# Altium PCB gumstix expansion board.PcbDoc
Units mil, origin at the board's own origin, x right, y up, seen from the top; angles counter-clockwise.
Board outline 3900 x 3900 mil, 2 copper layers (Top Layer, Bottom Layer); 19 components, 21 nets, 198 pads, 47 vias.
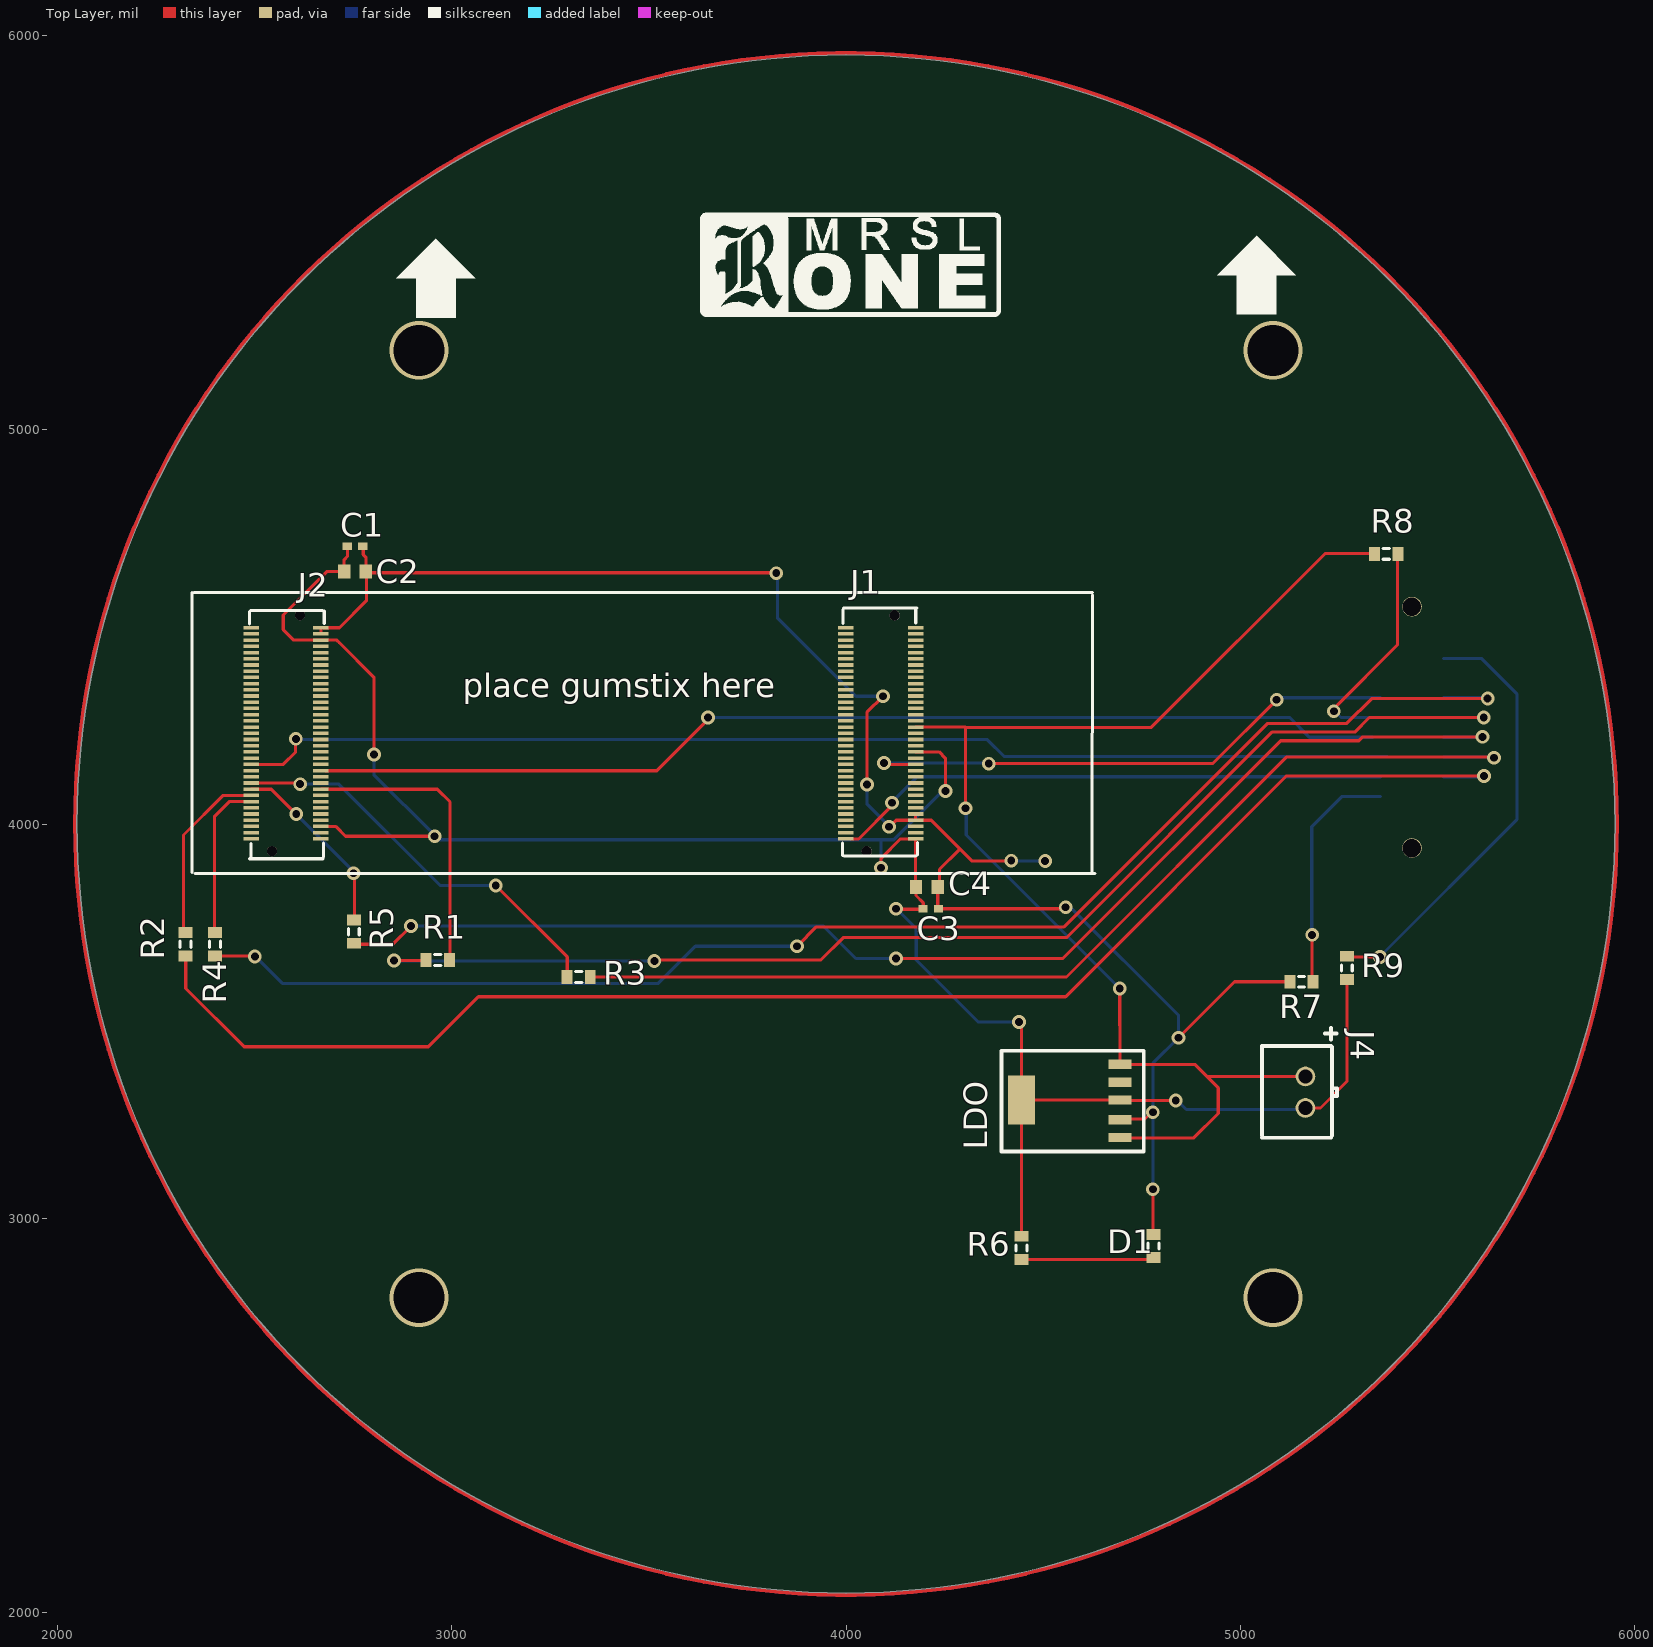
[diagram p0: Top Layer view]
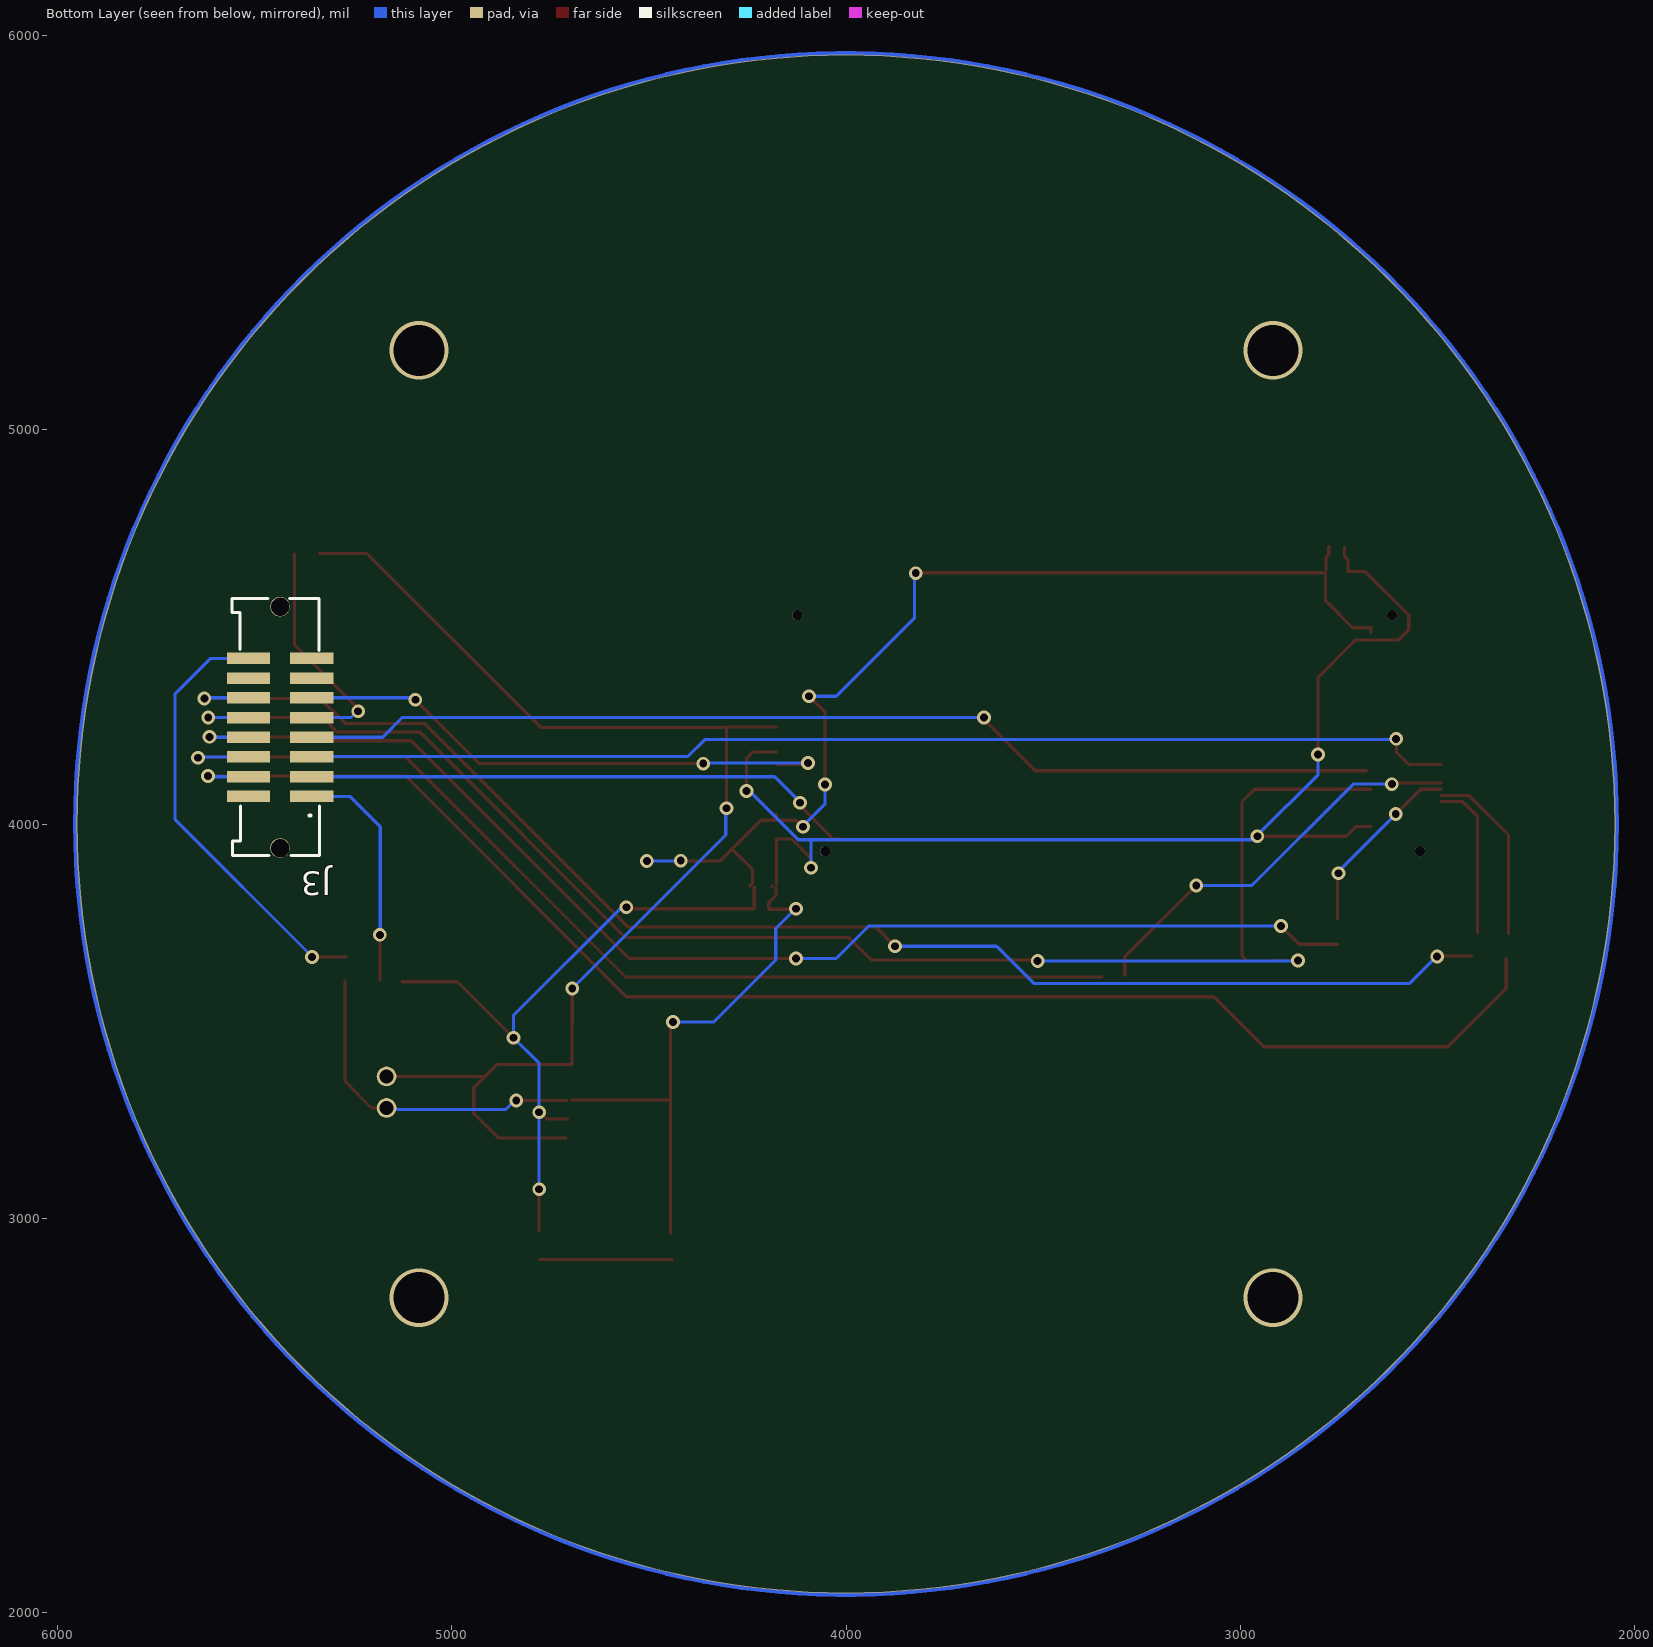
[diagram p1: Bottom Layer view, seen from below]

## Layer stack, top to bottom
Top Layer: signal copper 1.4
Dielectric: dielectric 12.6, FR-4, Dk 4.8
Bottom Layer: signal copper 1.4

## Board outline
4000,2050 cw(c4000,4000) 2050,4000 cw(c4000,4000) 4000,5950 cw(c4000,4000) 5950,4000 cw(c4000,4000)

## Design rules (kind name [scope] priority, off if disabled: settings)
Clearance [All] p1: gap=8
PolygonConnect [All] p1: connectstyle=Relief reliefconductorwidth=10 reliefentries=4 polygonreliefangle="90 Angle"
RoutingVias [All] p1: holewidth=20 width=35 viastyle="Through Hole" minholewidth=20 minwidth=35 maxholewidth=20 maxwidth=35
SMDNeckDown [All] p1: percent=400.000
SilkscreenOverComponentPads [All] p1: minsilkscreentomaskgap=10
SolderMaskExpansion [All] p1: expansion=4
Width [All] p1: maxlimit=8 minlimit=8 preferedwidth=8
27 further rules are at their usual default settings.

## Components (designator, comment, footprint, x,y, rotation, side; value= is the part's Value field where it differs from the comment)
C1 "" CAPC1005L 2755,4704 r0 top
C2 "Cap Semi" CAPC1608L 2755,4640 r0 top
C3 "" CAPC1005L 4215,3785 r0 top
C4 "Cap Semi" CAPC1608L 4205,3840 r0 top
D1 "LED" SurfaceMount(603) 4780,2930 r270 top
J1 "70 pin connector" "AVX CONN_70" 4087.87,4230 r0 top locked
J2 "70 pin connector" "AVX CONN_70" 2580,4230 r180 top locked
J3 "expansion" "HEADERSM 8X2" 5435,4245 r0 bottom locked
J4 "Bat" BatteryConnJST 5165,3320 r270 top
LDO "TPS73733" SOT-223-5pin 4695,3300 r90 top
R1 "Res3" RESC1608L 2965,3655 r0 top
R2 "Res3" RESC1608L 2325,3695 r90 top
R3 "Res3" RESC1608L 3322,3612 r180 top
R4 "Res3" RESC1608L 2400,3695 r270 top
R5 "Res3" RESC1608L 2752,3727 r270 top
R6 "Res3" RESC1608L 4445,2925 r270 top
R7 "Res3" RESC1608L 5155,3600 r0 top
R8 "Res3" RESC1608L 5370,4685 r0 top
R9 "Res3" RESC1608L 5270,3635 r270 top

## Footprints (in the part's own frame and the unit in brackets; to place one, negate y for a bottom-side part, rotate by r counter-clockwise, add the part's x,y. Pads: shape width x height; smd on the part's side, far side on the other; paste and mask are expansions set on the pad)
"AVX CONN_70" [mm]
  rect 1x0.23 smd: 1(-2.25,-6.8) 2(-2.25,-6.4) 3(-2.25,-6) 4(-2.25,-5.6) 5(-2.25,-5.2) 6(-2.25,-4.8) 7(-2.25,-4.4) 8(-2.25,-4) 9(-2.25,-3.6) 10(-2.25,-3.2) 11(-2.25,-2.8) 12(-2.25,-2.4) 13(-2.25,-2) 14(-2.25,-1.6) 15(-2.25,-1.2) 16(-2.25,-0.8) 17(-2.25,-0.4) 18(-2.25,0) 19(-2.25,0.4) 20(-2.25,0.8) 21(-2.25,1.2) 22(-2.25,1.6) 23(-2.25,2) 24(-2.25,2.4) 25(-2.25,2.8) 26(-2.25,3.2) 27(-2.25,3.6) 28(-2.25,4) 29(-2.25,4.4) 30(-2.25,4.8) 31(-2.25,5.2) 32(-2.25,5.6) 33(-2.25,6) 34(-2.25,6.4) 35(-2.25,6.8) 36(2.25,6.8) 37(2.25,6.4) 38(2.25,6) 39(2.25,5.6) 40(2.25,5.2) 41(2.25,4.8) 42(2.25,4.4) 43(2.25,4) 44(2.25,3.6) 45(2.25,3.2) 46(2.25,2.8) 47(2.25,2.4) 48(2.25,2) 49(2.25,1.6) 50(2.25,1.2) 51(2.25,0.8) 52(2.25,0.4) 53(2.25,0) 54(2.25,-0.4) 55(2.25,-0.8) 56(2.25,-1.2) 57(2.25,-1.6) 58(2.25,-2) 59(2.25,-2.4) 60(2.25,-2.8) 61(2.25,-3.2) 62(2.25,-3.6) 63(2.25,-4) 64(2.25,-4.4) 65(2.25,-4.8) 66(2.25,-5.2) 67(2.25,-5.6) 68(2.25,-6) 69(2.25,-6.4) 70(2.25,-6.8)
  round 0.65 hole 0.65: C1(-0.9,-7.6) C2(0.9,7.6)
  silkscreen extent -2.46,-7.9 2.36,8.08
BatteryConnJST [mil] "Connector for Battery"
  round 50 hole 35: 1(-40,0) 2(40,0)
  silkscreen extent -163,-110 116,80
CAPC1005L [mm] "Chip Capacitor, Body 1.0x0.5mm, IPC High Density"
  rect 0.6x0.5 smd: 1(-0.5,0) 2(0.5,0)
  body extent -0.55,-0.3 0.55,0.3, height 1.3
CAPC1608L [mm] "Chip Capacitor, Body 1.6x0.8mm, IPC High Density"
  rect 0.8x0.9 smd: 1(-0.7,0) 2(0.7,0)
  body extent -0.87,-0.48 0.87,0.48, height 1.3
"HEADERSM 8X2" [mm]
  rect 2.795x0.74 smd: 1(-2.033,4.445) 2(2.033,4.445) 3(-2.033,3.175) 4(2.033,3.175) 5(-2.033,1.905) 6(2.033,1.905) 7(-2.033,0.635) 8(2.033,0.635) 9(-2.033,-0.635) 10(2.033,-0.635) 11(-2.033,-1.905) 12(2.033,-1.905) 13(-2.033,-3.175) 14(2.033,-3.175) 15(-2.033,-4.445) 16(2.033,-4.445)
  round 1.27 hole 1.19: c1(0,7.773) c2(0,-7.773)
  silkscreen extent -2.54,-8.29 3.1,8.25
RESC1608L [mm] "Chip Resistor, Body 1.6x0.8mm, IPC High Density"
  rect 0.7x0.9 smd: 1(-0.75,0) 2(0.75,0)
  silkscreen extent -0.2,-0.35 0.2,0.35, body extent -0.85,-0.48 0.85,0.48, height 0.9
SOT-223-5pin [mm] "sot223 tps73733"
  rect 0.6x1.5 smd: 1(-2.413,0) 2(-1.27,0) 3(0,0) 4(1.143,0) 5(2.3,0)
  rect 3.15x1.75 smd: 6(0,6.35)
  silkscreen extent -3.3,-1.52 3.17,7.65
SurfaceMount(603) [mm]
  rect 0.7x0.9 smd: 1(-0.75,0) 2(0.75,0)
  silkscreen extent -0.2,-0.35 0.2,0.35, body extent -0.85,-0.48 0.85,0.48, height 0.9

## Part data
C1 C3: library part Cap, "Capacitor"
C2 C4: "Capacitor (Semiconductor SIM Model)"
J1 J2: library part "70 pin AVX connector"
J3: library part "HEADER 8X2"
J4: library part BatteryConnJST
LDO: library part LDO33-TI-TPS73733
R1 R2 R3 R4 R5 R6 R7 R8 R9: "Resistor"

## Via types
v1: diameter 35, hole 20, Top Layer to Bottom Layer, 43 vias
v2: diameter 149, hole 129, Top Layer to Bottom Layer, 4 vias

## Nets (pads, with @x,y where several pads share a name; then routed paths per layer and width w, separated by ;. In a path a pad name is that pad's centre, name@x,y a point inside that pad or via, vN(x,y) a via of type N, cw(c..) or ccw(c..) an arc to the next point about the centre after c; other vN are vias at no path point)
3.3V: C1.2 C2.2 C3.2 C4.2 D1.1 J1.66 J1.67 J2.1 J2.2 LDO.2 R7.1 | length 4476.6
  Top Layer w8: J2.2@2668.58,4485.42 J2.1 2715.72,4497.72 2784,4566 C2.2@2784,4638 ; C1.2@2776,4703 2776,4683 2782.56,4676.44 C2.2@2782.56,4644 ; C2.2@2791,4637 v1@3817,4637 ; v1(4053,4100) 4053,4283 v1(4094,4324) ; v1@4113,3995 4127.53,4009.53 J1.67 4216.47,4009.53 4320,3906 ; J1.67@4176.46,4010.46 J1.66 ; C3.2@4232.56,3786.44 C4.2 ; C3.2 v1@4553,3785 ; C4.2@4244,3842.56 4237,3849.56 4237,3885 4287,3935 ; 4322,3906 4320,3906 ; v1@4415,3908 4413,3906 4320,3906 ; v1@4565,3791 v1@4565,3793 ; LDO.2@4707,3252 4758,3252 4775,3269 v1(4778,3269) ; D1.1@4778,2968 v1(4778,3074) ; v1(4843,3458) 4985,3600 R7.1
  Bottom Layer w8: v1@3826,4635 3826,4523 4025,4324 v1(4094,4324) ; v1(4053,4100) 4053,4051 v1@4108,3996 ; v1@4415,3908 4417,3906 v1(4505,3906) ; v1@4565,3793 4843,3515 v1(4843,3458) 4778,3393 v1(4778,3269) v1@4778,3079
  other v1: 4557,3789 4419,3907 4109,3993 3823,4636
ADC_EXPAND: J1.58 J3.11 | length 1403.7
  Top Layer w8: v1@4096.74,4151.26 J1.58 ; v1@4358,4153.26 4930.26,4153.26 v1(5092,4315)
  Bottom Layer w8: v1(4096,4155) v1@4356,4155 ; v1@5092,4320 J3.11
  other v1: 4362,4153
FTDI_RX: J2.48 J3.5 | length 2940.1
  Top Layer w8: J2.48 2573.26,4151.26 2604,4182 v1@2604,4215
  Bottom Layer w8: v1@2608,4214 4358,4214 4401,4171 J3.5@5372,4171
  other v1: 2605,4216
FTDI_TX: J2.24 J3.7 | length 2733.3
  Top Layer w8: J2.24@2681,4135 3519.8,4135 ; 3520,4135 v1@3653.5,4268.5
  Bottom Layer w8: v1(3650,4270) 5125,4270 5175,4220 J3.7@5335,4220
GND: C1.1 C2.1 C3.1 C4.1 J1.56 J1.70 J2.3 J2.33 J4.2 LDO.3 LDO.6 R6.1 R9.2 | length 5420.6
  Top Layer w8: 2643.15,4466.22 2636.78,4466.22 ; J2.33 2703.78,3993.78 ; 2707,3993 2731,3969 v1@2954,3969 ; 2715,4460 2716,4459 ; C2.1 2683,4640 2573,4530 2573,4493 2599.78,4466.22 2636.78,4466.22 ; C2.1@2727.44,4644 2727.44,4670.44 2736,4679 C1.1@2736,4702 ; v1@2803,4181 2803,4372 2716,4459 ; v1(2957,3969) v1@2957,3972 ; v1(4089,3889) 4089,3913 4138.28,3962.28 J1.70 C4.1@4176.46,3847.54 ; v1@4121,3792 4125,3792 4133,3784 C3.1@4195,3784 ; J1.56 4236.24,4182.76 4252,4167 v1@4252,4088 ; C4.1 4177.44,3818.56 4196,3800 C3.1@4196,3787 ; C4.1@4187,3842 C4.1@4188,3841 ; v1(4439,3498) 4445,3492 LDO.6 R6.1@4445,2963 ; LDO.6@4447,3300 LDO.3 ; LDO.3@4708,3299 4834,3299 v1@4837,3302 ; J4.2 5203,3280 5270,3347 R9.2@5270,3601 ; 2636.78,4466.22 J2.3 2708.78,4466.22 2716,4459
  Bottom Layer w8: v1(2803,4176) 2803,4125 v1@2957,3971 ; v1(2957,3969) 2966,3960 4089,3960 ; v1(4089,3889) 4089,3960 ; v1@4121,3792 4178,3735 4178,3655 4335,3498 v1(4439,3498) ; v1@4243,4082 4121,3960 4089,3960 ; v1@4837,3302 4863,3276 J4.2@5158,3276
  other v1: 4836,3299 4127,3785 4252,4084
NetD1_2: D1.2 R6.2 | length 336.5
  Top Layer w8: R6.2@4440,2895.47 D1.2@4776.47,2895.47
NetJ2_27: J2.27 R1.2 | length 742.4
  Top Layer w8: J2.27 2963,4088.27 ; 2964,4088 2996,4056 2996,3666 R1.2@2987,3657
NetJ2_42: J2.42 R4.1 | length 403.6
  Top Layer w8: R4.1@2399,3724 2399,4020 2435.77,4056.77 J2.42
NetJ2_43: J2.43 R2.2 | length 463.1
  Top Layer w8: R2.2@2320,3722 2320,3972 2420.52,4072.52 J2.43
NetJ2_44: J2.44 R5.1 | length 464.3
  Top Layer w8: J2.44 2542.73,4088.27 v1(2606,4025) ; R5.1@2754,3759 v1@2754,3876
  Bottom Layer w8: v1(2606,4025) v1@2752,3879
  other v1: 2751,3875
NetJ2_45: J2.45 R3.2 | length 1021.7
  Top Layer w8: J2.45 v1@2615.98,4104.02 ; v1(3112,3844) 3293,3663 R3.2@3293,3617
  Bottom Layer w8: v1@2624,4092 2633,4101 2714,4101 2971,3844 v1@3109,3844
  other v1: 2616,4101
NetJ3_1: J3.1 R7.2 | length 592.9
  Top Layer w8: R7.2@5182,3605 v1(5182,3719)
  Bottom Layer w8: v1@5181,3720 5181,3993 5258,4070 J3.1
NetJ3_9: J3.9 R8.2 | length 598.2
  Top Layer w8: v1@5239,4295 5398,4454 5398,4683.47 R8.2
  Bottom Layer w8: v1@5234,4291 v1@5236,4289 ; v1@5236,4284 v1@5236,4289 ; v1@5236,4296 v1@5236,4289 ; J3.9 5255,4270 v1@5236,4289
  other v1: 5237,4286
NetJ3_16: J3.16 R9.1 | length 1120
  Top Layer w8: R9.1@5267,3663 v1(5354,3663)
  Bottom Layer w8: v1@5354,3664 5701,4011 5701,4330 5611,4420 J3.16
RESET: J1.1 J3.3 | length 1408.2
  Top Layer w8: J1.1@4013,3962 4032,3962 v1@4117.5,4047.5
  Bottom Layer w8: v1@4112,4059 4120,4059 4181,4120 J3.3
  other v1: 4117,4054
SPI_CLK: J3.4 R2.1 | length 3808.8
  Top Layer w8: R2.1@2326,3659 2326,3583 2474,3435 2941,3435 3068,3562 4557,3562 5117,4122 v1(5618,4122)
  Bottom Layer w8: J3.4 v1@5610,4120
SPI_MISO: J3.6 R3.1 | length 2655.2
  Top Layer w8: R3.1 4559,3612 5116,4169 ; 5117,4170 v1@5639,4170
  Bottom Layer w8: J3.6 5648,4170 v1@5643,4170
  other v1: 5643,4168
SPI_MOSI: J3.8 R5.2 | length 3240.8
  Top Layer w8: R5.2@2754,3695 2851,3695 v1(2897,3741) ; v1(4127,3659) 4550,3659 5102,4211 5300,4211 5310,4221 v1(5614,4221)
  Bottom Layer w8: v1(2897,3741) 3943,3741 4025,3659 v1(4127,3659) ; J3.8 v1@5610,4220
SPI_SEL_EXPAND0: J3.10 R1.1 | length 3180.7
  Top Layer w8: v1(2854,3654) R1.1@2922,3654 ; v1@3519,3655 3936,3655 3993,3712 4559,3712 5080,4233 5290,4233 5327,4270 v1(5617,4270)
  Bottom Layer w8: v1@2852,3653 v1(3514,3653) ; J3.10 v1@5613,4270
SPI_SEL_EXPAND1: J3.12 R4.2 | length 3650.6
  Top Layer w8: R4.2@2413,3665 v1@2502,3665 ; v1(3876,3690) 3925,3739 4553,3739 5069,4255 5270,4255 5333,4318 v1(5627,4318)
  Bottom Layer w8: v1@2502,3665 2571,3596 3524,3596 3618,3690 v1@3873,3690 ; J3.12 v1@5627,4320
  other v1: 2501,3664
VBAT: J1.52 J4.1 LDO.1 LDO.5 R8.1 | length 3198.4
  Top Layer w8: J1.52 4303,4245.75 v1(4303,4040) ; 4304.5,4245 4774,4245 5215,4686 R8.1@5335,4686 ; v1(4694,3583) LDO.5 4884.45,3390.55 4944,3331 4944,3266 4882,3204 LDO.1@4710,3204 ; 4917,3360 J4.1
  Bottom Layer w8: v1@4305,4036 4305,3972 v1(4694,3583)
pads on no net: J1.2 J1.3 J1.4 J1.5 J1.6 J1.7 J1.8 J1.9 J1.10 J1.11 J1.12 J1.13 J1.14 J1.15 J1.16 J1.17 J1.18 J1.19 J1.20 J1.21 J1.22 J1.23 J1.24 J1.25 J1.26 J1.27 J1.28 J1.29 J1.30 J1.31 J1.32 J1.33 J1.34 J1.35 J1.36 J1.37 J1.38 J1.39 J1.40 J1.41 J1.42 J1.43 J1.44 J1.45 J1.46 J1.47 J1.48 J1.49 J1.50 J1.51 J1.53 J1.54 J1.55 J1.57 J1.59 J1.60 J1.61 J1.62 J1.63 J1.64 J1.65 J1.68 J1.69 J1.C1 J1.C2 J2.4 J2.5 J2.6 J2.7 J2.8 J2.9 J2.10 J2.11 J2.12 J2.13 J2.14 J2.15 J2.16 J2.17 J2.18 J2.19 J2.20 J2.21 J2.22 J2.23 J2.25 J2.26 J2.28 J2.29 J2.30 J2.31 J2.32 J2.34 J2.35 J2.36 J2.37 J2.38 J2.39 J2.40 J2.41 J2.46 J2.47 J2.49 J2.50 J2.51 J2.52 J2.53 J2.54 J2.55 J2.56 J2.57 J2.58 J2.59 J2.60 J2.61 J2.62 J2.63 J2.64 J2.65 J2.66 J2.67 J2.68 J2.69 J2.70 J2.C1 J2.C2 J3.2 J3.13 J3.14 J3.15 J3.c1 J3.c2 LDO.4
copper on no net:
  other v2: 2917,2799 5083,2799 2917,5201 5083,5201

## Other copper
Multi-Layer:
  circle w10: c4000,4000 r1955

## Silkscreen, mask and mechanical layers (free items; w line width, h text height)
Top Overlay:
  drawing of 2370 lines, arcs and shapes, not listed
  text "place gumstix here" at 3028,4322 h60
Mechanical 1:
  lines w5: 2000,4000 6000,4000 ; 4000,2000 4000,6000